# Altium PCB FEDD_TIMER_DP_7.PcbDoc
Units mm, origin at the board's own origin, x right, y up, seen from the top; angles counter-clockwise.
Board outline 95 x 87 mm, 2 copper layers (Top Layer, Bottom Layer); 56 components, 51 nets, 211 pads, 20 vias.
Unrouted connection lines stored in the file: 1.
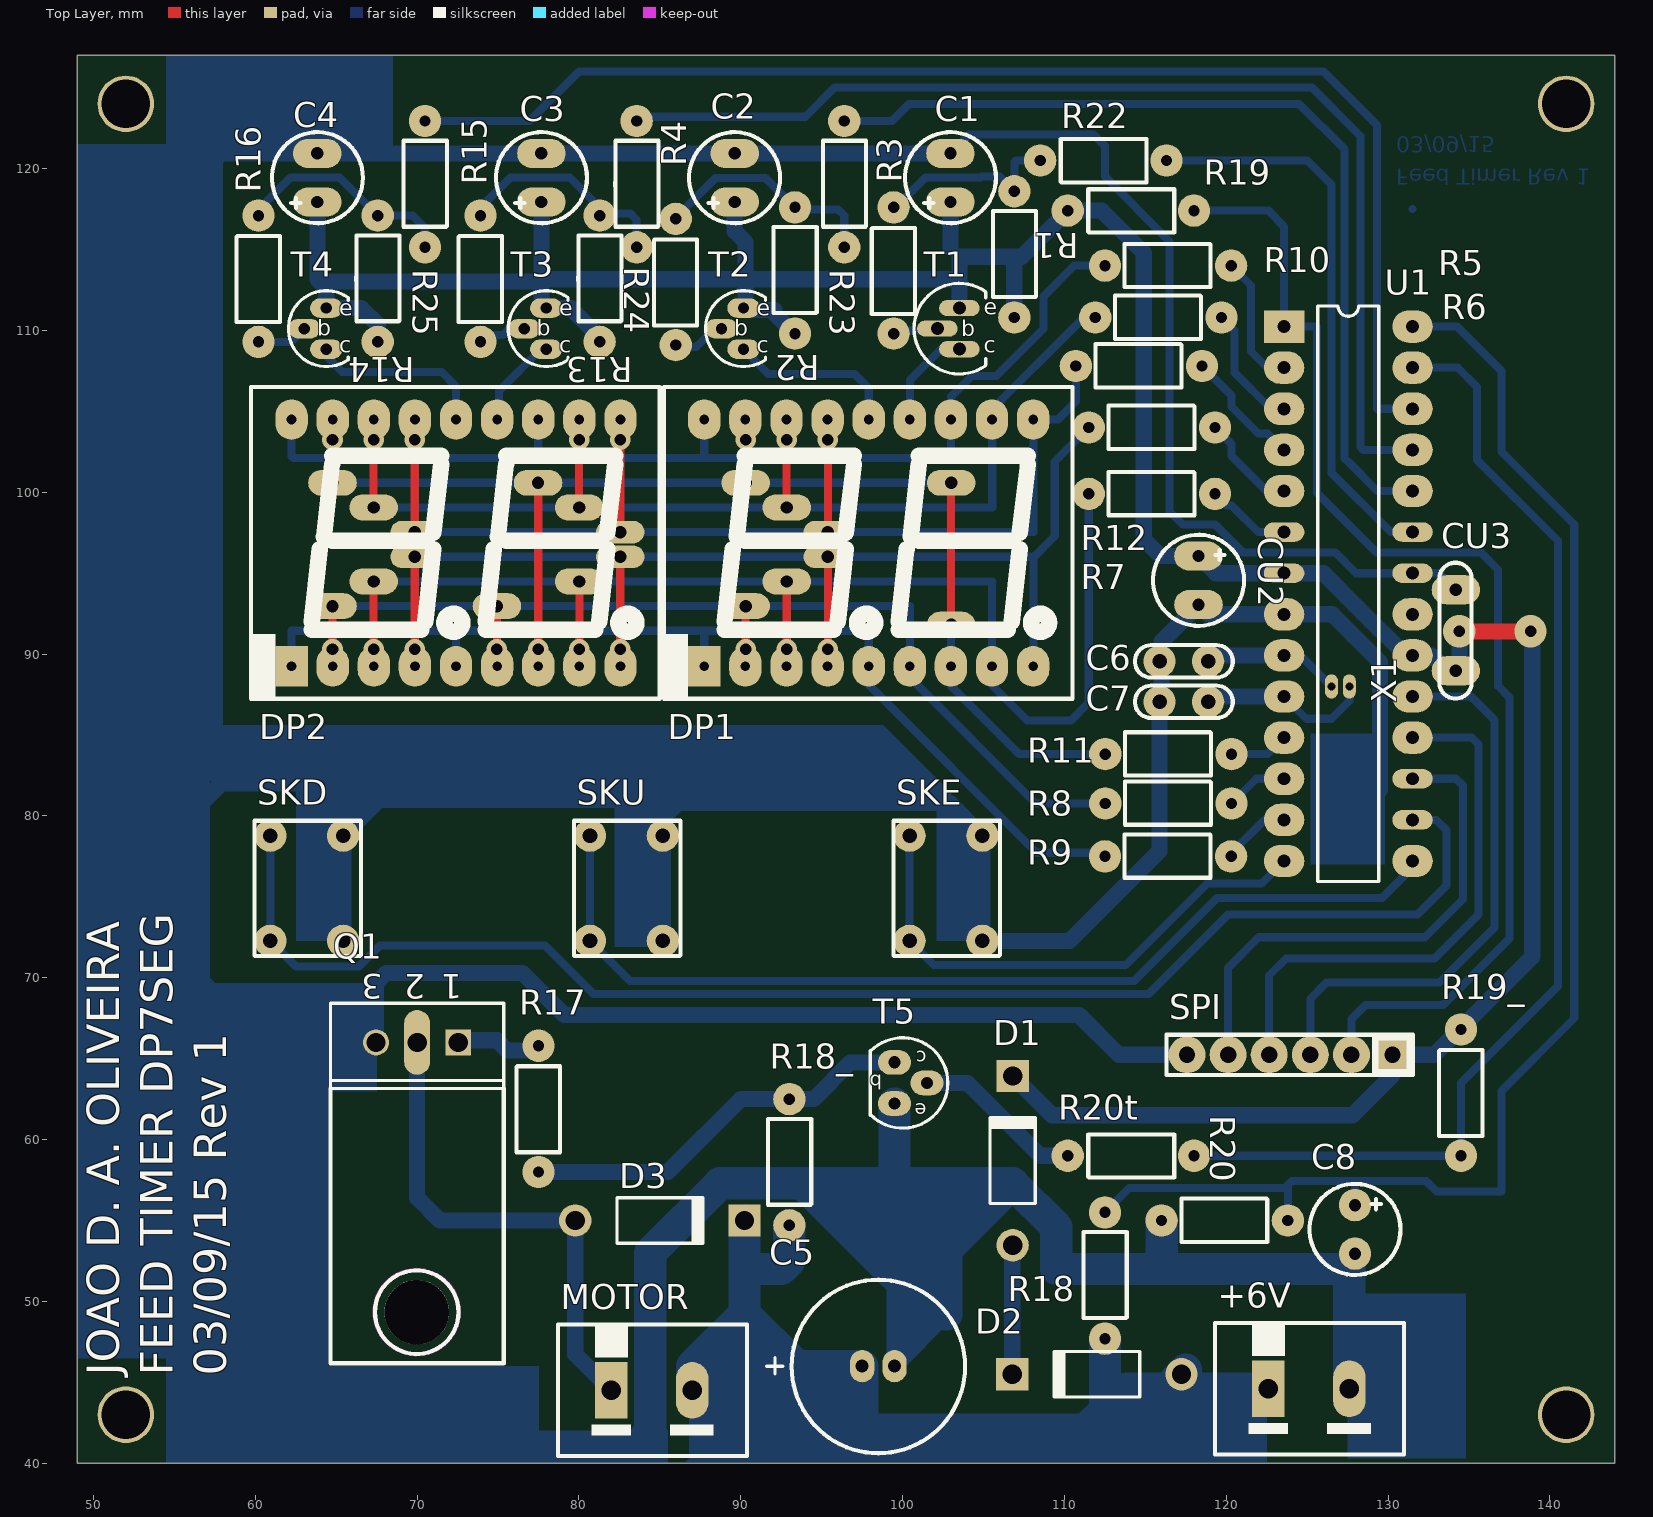
[diagram p0: Top Layer view]
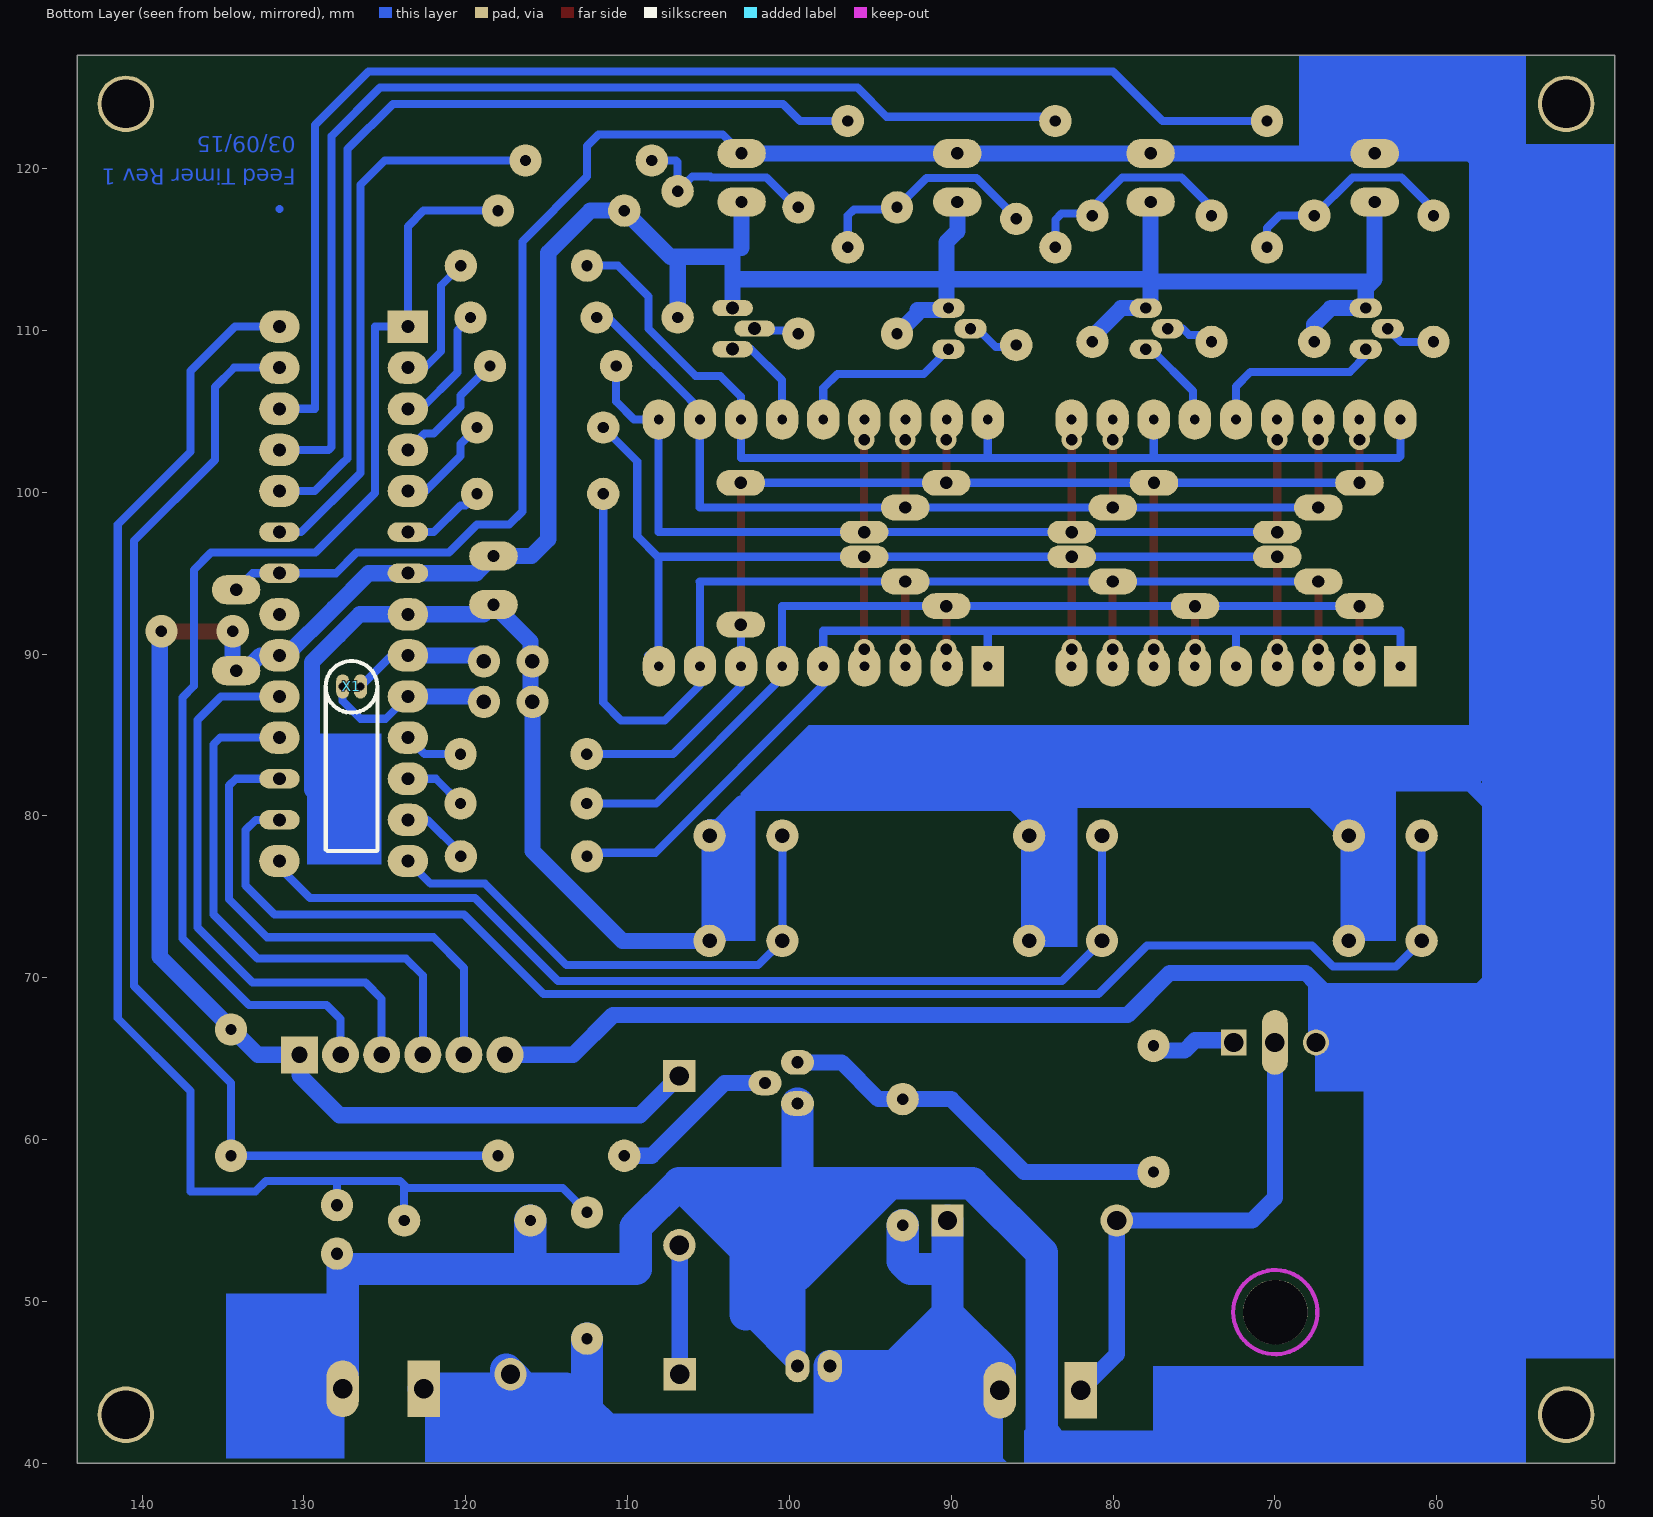
[diagram p1: Bottom Layer view, seen from below]
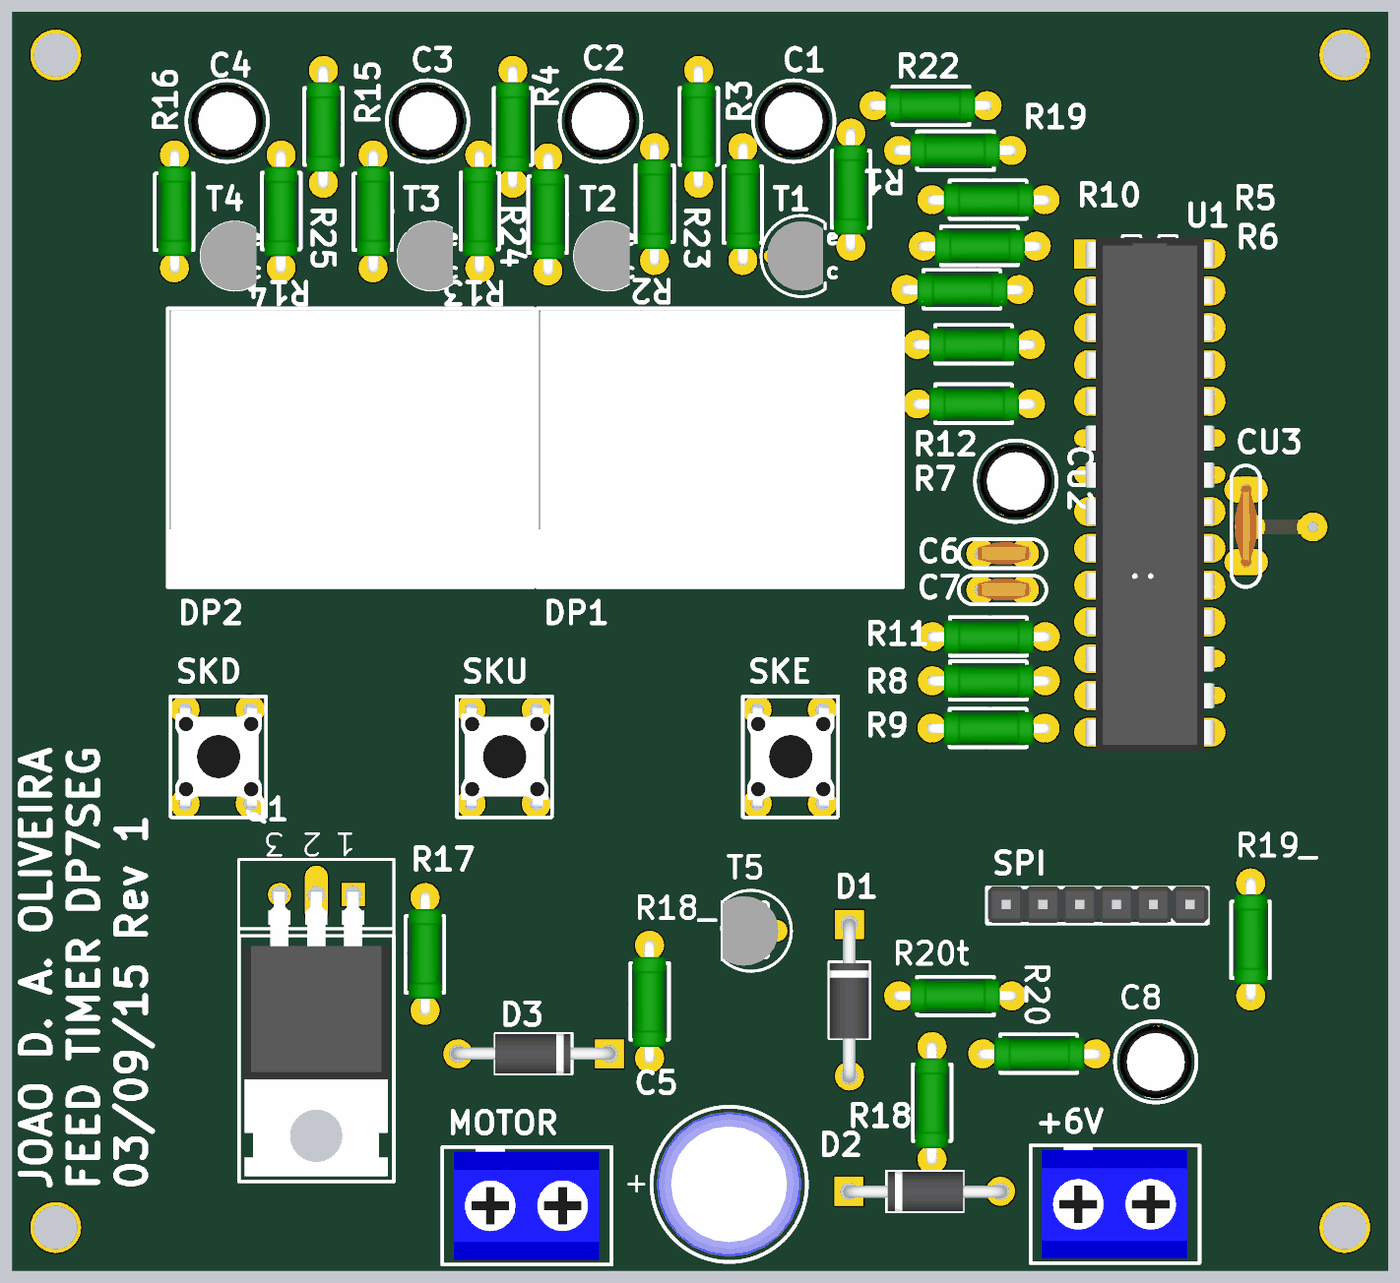
[diagram p2: 3D render of the assembled board from above, using the file's embedded part models]

## Layer stack, top to bottom
Top Solder: solder mask 0.0102, Solder Resist, Dk 3.5
Top Layer: signal copper 0.0356
Dielectric1: dielectric 0.32, FR-4, Dk 4.8
Bottom Layer: signal copper 0.0356
Bottom Solder: solder mask 0.0102, Solder Resist, Dk 3.5

## Board outline
144,127 49,127 49,40 144,40

## Design rules (kind name [scope] priority, off if disabled: settings)
Clearance [All] p1: gap=0.254
PolygonConnect [All] p1: connectstyle=Relief reliefconductorwidth=0.254 reliefentries=4 polygonreliefangle="90 Angle" airgapwidth=0.254
RoomDefinition FEED_TIMER_DP_7 [InComponentClass('FEED_TIMER_DP_7')] p1: confinementstyle=ConfineIn formatcopy=TRUE lockcomponents=FALSE outline 145,71 151,71 151,127 145,127
RoutingVias [All] p1: holewidth=0.711 width=1.27 viastyle="Through Hole" minholewidth=0.711 minwidth=1.27 maxholewidth=0.711 maxwidth=1.27
SilkToSolderMaskClearance SilkscreenOverComponentPads [IsPad] p1: minsilkscreentomaskgap=0.254 clearancetoexposedcopper=TRUE
SolderMaskExpansion [All] p1: expansion=0.102
UnpouredPolygon [All] p1: allowunpoured=FALSE
Width [All] p1: maxlimit=2 minlimit=0.5 preferedwidth=1
28 further rules are at their usual default settings.

## Components (designator, comment, footprint, x,y, rotation, side; value= is the part's Value field where it differs from the comment)
+6V "Male Connector 2 pins" BR102A 122.6,44.6 r90 top
C1 "Cap. Elet." "CAP ELE RAD 11mm H"#1 104.902,119.888 r90 top
C2 "Cap. Elet." "CAP ELE RAD 11mm H"#1 91.567,119.888 r90 top
C3 "Cap. Elet." "CAP ELE RAD 11mm H"#1 79.629,119.888 r90 top
C4 "Cap. Elet." "CAP ELE RAD 11mm H"#1 65.786,119.888 r90 top
C5 "Cap. Elet." CAP_RADIAL_2_10_16 97.5,46 r0 top
C6 "Disco" "CAP CER DISK 3MM" 119,89.5 r180 top
C7 "Disco" "CAP CER DISK 3MM" 119,87 r180 top
C8 "Cap. Elet." "CAP ELE RAD 11mm H"#2 126,54 r270 top
CU2 "Cap. Elet." "CAP ELE RAD 11mm H"#1 116.332,94.107 r270 top
CU3 "Disco" "CAP CER DISK 5MM" 134.112,88.646 r90 top
D1 "Diode 1N4001" DO-41 106.8,58.7 r90 top
D2 "Diode 1N4001" DO-41 112,45.5 r180 top
D3 "Diode 1N4001" DO-41 85,55 r0 top
DP1 "TOP5661BH" "DISPLAY TOP_5261BH" 87.743,89.242 r90 top locked
DP2 "TOP5661BH" "DISPLAY TOP_5261BH" 62.243,89.242 r90 top locked
MOTOR "Male Connector 2 pins" BR102A 82,44.5 r90 top
Q1 "IRF3205" "KC03 - Deitado" 70,66 r180 top
R1 "Resistor Generic" "RES 300 CR25" 106.9,118.6 r270 top
R2 "Resistor Generic" "RES 300 CR25" 93.345,117.602 r270 top
R3 "Resistor Generic" "RES 300 CR25" 99.441,109.802 r90 top
R4 "Resistor Generic" "RES 300 CR25" 85.979,109.093 r90 top
R5 "Resistor Generic" "RES 300 CR25" 111.9,110.8 r0 top
R6 "Resistor Generic" "RES 300 CR25" 110.7,107.8 r0 top
R7 "Resistor Generic" "RES 300 CR25" 111.5,99.9 r0 top
R8 "Resistor Generic" "RES 300 CR25" 112.522,80.772 r0 top
R9 "Resistor Generic" "RES 300 CR25" 112.5,77.5 r0 top
R10 "Resistor Generic" "RES 300 CR25" 112.5,114 r0 top
R11 "Resistor Generic" "RES 300 CR25" 112.522,83.82 r0 top
R12 "Resistor Generic" "RES 300 CR25" 111.5,104 r0 top
R13 "Resistor Generic" "RES 300 CR25" 81.28,117.094 r270 top
R14 "Resistor Generic" "RES 300 CR25" 67.564,117.094 r270 top
R15 "Resistor Generic" "RES 300 CR25" 73.914,109.294 r90 top
R16 "Resistor Generic" "RES 300 CR25" 60.198,109.294 r90 top
R17 "Resistor Generic" "RES 300 CR25" 77.5,58 r90 top
R18 "Resistor Generic" "RES 300 CR25" 112.5,55.5 r270 top
R18_ "Resistor Generic" "RES 300 CR25" 93,62.5 r270 top
R19 "Resistor Generic" "RES 300 CR25" 118,117.4 r180 top
R19_ "Resistor Generic" "RES 300 CR25" 134.5,59 r90 top
R20 "Resistor Generic" "RES 300 CR25" 116,55 r0 top
R20t "Resistor Generic" "RES 300 CR25" 118,59 r180 top
R22 "Resistor Generic" "RES 300 CR25" 116.3,120.5 r180 top
R23 "Resistor Generic" "RES 300 CR25" 96.393,122.936 r270 top
R24 "Resistor Generic" "RES 300 CR25" 83.566,122.936 r270 top
R25 "Resistor Generic" "RES 300 CR25" 70.485,122.936 r270 top
SKD "SW-PBST 4 Pins" "SW-PBST 4 Pins - SKHH 17 mm" 62.5,76 r0 top
SKE "SW-PBST 4 Pins" "SW-PBST 4 Pins - SKHH 17 mm" 102,76 r0 top
SKU "SW-PBST 4 Pins" "SW-PBST 4 Pins - SKHH 17 mm" 82.25,76 r0 top
SPI "BAR 6 PINS" "HEADER BAR 6 PINS" 129,64 r180 top
T1 "BC516" "TO-92 - Large" 103.505,110.109 r0 top
T2 "BC516" TO-92 90.17,110.109 r0 top
T3 "BC516" TO-92 77.978,110.109 r0 top
T4 "BC516" TO-92 64.389,110.109 r0 top
T5 "Transistor" "TO-92 - BIG" 99.5,63.5 r180 top
U1 "ATmega328-PA-PU" 28P3 123.571,110.236 r0 top
X1 "XTAL" "XTAL CILINDRIC DEITADO" 122.5,88 r180 bottom

## Footprints (in the part's own frame and the unit in brackets; to place one, negate y for a bottom-side part, rotate by r counter-clockwise, add the part's x,y. Pads: shape width x height; smd on the part's side, far side on the other; paste and mask are expansions set on the pad)
28P3 [mm] "Atmel DIP 28"
  rect 2.5x2 hole 0.8: 1(0,0)
  oval 2.5x2 hole 0.8: 2(0,-2.54) 3(0,-5.08) 4(0,-7.62) 5(0,-10.16) 8(0,-17.78) 9(0,-20.32) 10(0,-22.86) 11(0,-25.4) 12(0,-27.94) 13(0,-30.48) 14(0,-33.02) 15(7.938,-33.02) 18(7.938,-25.4) 19(7.938,-22.86) 20(7.937,-20.32) 21(7.938,-17.78) 24(7.938,-10.16) 25(7.938,-7.62) 26(7.938,-5.08) 27(7.938,-2.54) 28(7.938,0)
  oval 2.5x1.2 hole 0.8: 6(0,-12.7) 7(0,-15.24) 16(7.938,-30.48) 17(7.937,-27.94) 22(7.937,-15.24) 23(7.937,-12.7)
  silkscreen extent 2.09,-34.29 5.85,1.27, body extent -0.48,-34.4 8.43,1.1, height 3.2
BR102A [mm] "MetalTex Borne 2 vias passo 5mm"
  rect 3.5x2 hole 1.2: 1(0,0)
  oval 3.5x2 hole 1.2: 2(0,-5)
  silkscreen extent -4.06,-8.37 4.06,3.3, body extent -3.75,-7.5 3.75,2.5, height 10.01
"CAP CER DISK 3MM" [mm] "CAP CER DISK 3MM"
  round 2 hole 0.9: 1(0.125,-0.05) 2(3.125,-0.05)
  silkscreen extent -1.4,-1.05 4.65,0.95, body extent -0.29,-0.82 3.39,0.67, height 5
"CAP CER DISK 5MM" [mm] "CAP CER DISK 5MM"
  oval 1.8x3 hole 0.762: 1(0.325,-0.075) 2(5.325,-0.075)
  silkscreen extent -1.4,-1.05 7,0.95, body extent -0.01,-0.82 5.67,0.67, height 6.24
"CAP ELE RAD 11mm H"#1 [mm] "Cap Eletrolitic Radial 11mm Height"
  oval 1.8x3 hole 0.762: 1(-1.95,1.95) 2(1.05,1.95)
  silkscreen extent -3.26,-0.86 2.36,4.76, body extent -2.95,-0.55 2.05,4.45, height 4.52
"CAP ELE RAD 11mm H"#2 [mm] "Cap Eletrolitic Radial 11mm Height"
  round 2 hole 0.762: 1(-1.95,1.95) 2(1.05,1.95)
  silkscreen extent -3.26,-0.86 2.36,4.76, body extent -2.94,-0.55 2.1,4.45, height 11.03
CAP_RADIAL_2_10_16 [mm] "Cap Radial 2mm x 10mm x 16mm height"
  oval 1.5x2 hole 0.8: 1(0,0) 2(2,0)
  silkscreen extent -5.92,-5.38 6.36,5.34, body extent -4.01,-5.01 5.99,4.99, height 16.03
"DISPLAY TOP_5261BH" [mm] "7 Segment LED Display 2 digits"
  rect 2.5x2 hole 0.6: 1(0,0)
  oval 2.5x2 hole 0.6: 2(0,-2.54) 3(0,-5.08) 4(0,-7.62) 5(0,-10.16) 6(0,-12.7) 7(0,-15.24) 8(0,-17.78) 9(0,-20.32) 10(15.25,-20.32) 11(15.25,-17.78) 12(15.25,-15.24) 13(15.25,-12.7) 14(15.25,-10.16) 15(15.25,-7.62) 16(15.25,-5.08) 17(15.25,-2.54) 18(15.25,0)
  silkscreen extent -2,-22.75 17.25,2.5, body extent -1.9,-22.7 17.1,2.3, height 6.82
DO-41 [mm] "Diode, Axial; Body 5.2 x 2.7 mm (LxDia. max), Lead Dia. 0.86 mm (max)"
  round 2 hole 1.2: 1(-5.23,0)
  rect 2x2 hole 1.2: 2(5.23,0)
  silkscreen extent -2.65,-1.4 2.75,1.4, body extent -5.7,-1.36 5.62,1.4, height 2.74
"HEADER BAR 6 PINS" [mil] ".100 Inch AMPMODU Header 6 Pins"
  rect 90x90 hole 40: 1(-50,-48.82)
  round 90 hole 40: 2(50,-48.82) 3(150,-48.82) 4(250,-48.82) 5(350,-48.82) 6(450,-48.82)
  silkscreen extent -100,-98 500,0, body extent -102,-101 498,-2, height 328
"KC03 - Deitado" [mm] "TO, Thru-Hole, Vertical, Heatsink Mounted; 3 In-Line Leads; Pitch 2.54 mm"
  rect 1.6x1.6 hole 1.2: 1(-2.54,0)
  oval 1.6x4 hole 1.2: 2(0,0)
  round 1.6 hole 1.2: 3(2.54,0)
  round 4 hole 4: ""(0.025,16.662)
  Keep-Out Layer circle w0.254: c0.025,16.662 r2.6
  silkscreen extent -5.35,-2.42 5.35,19.83, body extent -4.99,-0.25 5.01,19.47, height 4.5
"RES 300 CR25" [mm] "Resistor CR25 300Mil height 2.4"
  round 2 hole 0.7: 1(0,0) 2(7.8,0)
  silkscreen extent 1.22,-1.35 6.53,1.35, body extent -0.34,-1.17 8.16,1.13, height 2.29
"SW-PBST 4 Pins - SKHH 17 mm" [mm] "Tactile switch SKHH 17mm"
  round 2 hole 0.9: 1(2.93,2.78) 2(2.93,-3.72) 3(-1.57,2.78) 4(-1.57,-3.72)
  silkscreen extent -2.56,-4.66 4.02,3.7, body extent -2.25,-4.45 3.75,3.51, height 13
TO-92 [mm] "TO, Flat Index; 3 In-Line, Axial Leads; Body Dia. 4.6mm; Leads 0.41 x 0.39 mm (max)"
  oval 2x1.2 hole 0.7: 1(0,1.27) 2(-1.36,0) 3(0,-1.27)
  silkscreen extent -2.34,-2.34 1.35,2.34, body extent -2.41,-2.39 1.46,2.41, height 2.76
"TO-92 - BIG" [mil] "TO, Flat Index; 3 In-Line, Axial Leads; Body Dia. 4.6mm; Leads 0.41 x 0.39 mm (max)"
  oval 80x60 hole 30: 1(0,50) 2(-78.74,0) 3(0,-50)
  silkscreen extent -130,-110 59,110, body extent -95,-94 57,95, height 109
"TO-92 - Large" [mm] "TO, Flat Index; 3 In-Line, Axial Leads; Body Dia. 4.6mm; Leads 0.41 x 0.39 mm (max)"
  oval 2.5x1 hole 0.8: 1(0,1.27) 2(-1.36,0) 3(0,-1.27)
  silkscreen extent -2.8,-2.8 1.63,2.8, body extent -2.41,-2.39 1.46,2.41, height 2.76
"XTAL CILINDRIC DEITADO" [mm] "CILINDRIC 3mm dia"
  oval 0.8x1.5 hole 0.5: 1(-5.1,0) 2(-4,0)
  silkscreen extent -6.16,-10.18 -2.96,1.57, body extent -6.05,-10 -3.05,0.2, height 2.95

## Part data
+6V MOTOR: library part "Male Con 2 Pin"
C1 C2 C3 C4 C5 C8 CU2: library part CAP_RADIAL_ELETROLITICO, "Capacitor Radial Eletrolitico"
C6 C7 CU3: library part CAP_DISCO, "SMD Capacitor 1210 size"
D1 D2 D3: "1 Amp General Purpose Rectifier"
DP1 DP2: library part "DISPLAY TOP_5261BH", "7 seg display"
Q1: library part "T-HEXFET N", "HEXFET Power MOSFET"
R1 R2 R3 R4 R5 R6 R7 R8 R9 R10 R11 R12 R13 R14 R15 R16 R17 R18 R18_ R19 R19_ R20 R20t R22 R23 R24 R25: "Generic Resistor"
SKD SKE SKU: library part "SW-PBST 4 Pins SKHH"
SPI: library part "HEADER BAR  6 PINS", ".100 Inch AMPMODU Headers 1-826629-0 (Tyco)"
T1 T2 T3 T4: library part T-PNP, "General Bipolar Transistor NPN"
T5: library part T-NPN, "General Bipolar Transistor NPN"
U1: "8-Bit AVR Microcontroller with 8K Bytes of In-System Programmable Flash Memory"
X1: "Crystal Oscillator"

## Free pads (board coordinates)
  oval 3x1.6 hole 0.762: 1(64.77,92.964) 1(64.77,100.584) 1(67.31,94.488) 1(67.31,99.06) 1(74.93,92.964) 1(77.47,100.584) 1(80.01,94.488) 1(80.01,99.06) 1(90.297,92.964) 1(90.297,100.584) 1(92.837,94.488) 1(92.837,99.06) 1(102.997,91.821) 1(102.997,100.584)
  oval 3x1.4 hole 0.762: 1(69.85,96.012) 1(69.85,97.536) 1(82.55,96.012) 1(82.55,97.536) 1(95.377,96.012) 1(95.377,97.536)
  round 3.5 hole 3: ""(52,43) ""(52,124) ""(141,43) ""(141,124)

## Via types
v1: diameter 1.27, hole 0.711, Top Layer to Bottom Layer, 18 vias
v2: diameter 2, hole 0.711, Top Layer to Bottom Layer, 2 vias

## Nets (pads, with @x,y where several pads share a name; then routed paths per layer and width w, separated by ;. In a path a pad name is that pad's centre, name@x,y a point inside that pad or via, vN(x,y) a via of type N, cw(c..) or ccw(c..) an arc to the next point about the centre after c; other vN are vias at no path point)
6V: +6V.1 C5.1 D2.1 D3.2 MOTOR.2 R18.2 R18_.2 | length 62
  Bottom Layer w2: MOTOR.2 87,46 90.23,49.23 ; D3.2 90.23,52 ; R18_.2 93,52.5 92.5,52 90.23,52 ; R18.2 112.5,43.5 112.615,43.385 ; 116,44.27 116.33,44.6 ; D2.1@117.5,45.77 D2.1 116.33,44.6 ; +6V.1 116.33,44.6 ; 90.23,49.23 93.46,46 97.496,46 97.496,42.304 97.73,42.07 111.3,42.07 112.615,43.385 ; 90.23,49.23 90.23,52 ; 112.615,43.385 113.5,44.27 113.83,44.6 116.33,44.6
DPDRV1: DP1.13 T1.3 | length 6.3
  Bottom Layer w0.5: DP1.13 100.457,104.506 100.457,106.934 102.362,108.839 T1.3
DPDRV2: DP1.14 T2.3 | length 10.7
  Bottom Layer w0.5: T2.3 91.694,107.315 97.028,107.315 97.903,106.44 DP1.14
DPDRV3: DP2.13 T3.3 | length 5.8
  Bottom Layer w0.5: DP2.13 75.057,104.606 75.057,106.257 77.639,108.839 T3.3
DPDRV4: DP2.14 T4.3 | length 11.3
  Bottom Layer w0.5: T4.3 64.389,108.411 65.358,107.442 71.501,107.442 72.403,106.54 DP2.14
DRV1: R22.1 U1.23 | length 35.1
  Bottom Layer w0.5: R22.1 125,120.5 126.5,119 126.5,101.2 130.164,97.536 U1.23
DRV2: R23.1 U1.24 | length 56.7
  Bottom Layer w0.5: R23.1 99.336,122.936 100.4,124 124.5,124 127.3,121.2 127.3,102.095 127.507,101.888 127.512,101.888 129.324,100.076 U1.24
DRV3: R24.1 U1.25 | length 69.3
  Bottom Layer w0.5: R24.1 83.83,123.2 93.99,123.2 95.79,125 125.3,125 128.3,122 128.3,102.8 128.484,102.616 U1.25
DRV4: R25.1 U1.26 | length 81.2
  Bottom Layer w0.5: R25.1 76.936,122.936 80,126 126,126 129.3,122.7 129.3,105.156 U1.26
GND: +6V.2 C1.2 C2.2 C3.2 C4.2 C5.2 C6.2 C7.2 C8.2 CU2.2 CU3.2 Q1.3 R20.1 SKD.1 SKD.2 SKE.1 SKE.2 SKU.1 SKU.2 SPI.6 T5.1 U1.8 U1.22 | length 490.4
  Bottom Layer w0.5: C1.2 104.114,122.1 111.8,122.1 112.5,121.4 112.5,119.5 116.5,115.5 116.5,98.806 117.306,98 119.3,98 121.034,96.266 126.746,96.266 128.016,94.996 U1.22 133.162,94.996 CU3.2
  Bottom Layer w1: SKD.2 SKD.1 ; Q1.3 67.46,69.66 ; 67.625,69.825 67.46,69.66 ; 84.025,41.525 58.525,41.525 58,41 58,66.4 57.6,66.8 ; SKU.2 SKU.1 ; 99.5,51.6 C5.2 102.7,49.2 ; C1.2 C2.2 C3.2 C4.2 57.938,120.938 56.7,119.7 56.7,80.8 ; SPI.6 113.36,65.24 110.9,67.7 79.1,67.7 76.5,70.3 68.1,70.3 67.46,69.66 ; 129.5,81.621 129.5,89.5 127.849,91.151 126.544,92.456 U1.8 118.883,92.456 CU2.2 116,90.775 116,87.175 C7.2 115.875,77.84 110.315,72.28 SKE.2 SKE.1 102.91,80.8 86.1,80.8 85.2,79.9 85.2,78.8 SKU.1 ; 56.7,80.8 57.9,82 64.5,82 65.43,81.07 SKD.1 ; 56.7,80.8 56.7,67.7 57.6,66.8 ; 57.6,66.8 58.1,66.3 58.15,66.35 62.3,66.35 64.75,68.8 66.6,68.8 67.46,69.66 ; SKD.1 67.65,81 83.8,81 85.18,79.62 SKU.1
  Bottom Layer w2: 84.025,41.525 84.4,41.9 84.4,53 88.7,57.3 93.8,57.3 99.5,51.6 ; 99.5,57.5 T5.1 ; 102.7,49.2 102.7,53.2 106.8,57.3 109.5,54.6 109.5,52 116,52 ; R20.1 116,52 ; +6V.2 127.6,52 121,52 116,52
KD: SKD.3 SKD.4 U1.16 | length 90.2
  Bottom Layer w0.5: SKD.3 SKD.4 62.51,70.7 66.4,70.7 67.7,72 77.9,72 80.9,69 115.2,69 120.1,73.9 131.812,73.9 133.604,75.692 133.604,79.121 132.969,79.756 U1.16
KE: SKE.3 SKE.4 U1.14 | length 32.9
  Bottom Layer w0.5: SKE.3 SKE.4 101.934,70.776 113.776,70.776 118.811,75.811 122.166,75.811 U1.14
KU: SKU.3 SKU.4 U1.15 | length 61.7
  Bottom Layer w0.5: SKU.3 SKU.4 83.16,69.8 114.3,69.8 119.43,74.93 129.63,74.93 131.509,76.809 U1.15
MISO: SPI.4 U1.18 | length 34.2
  Bottom Layer w0.5: SPI.4 122.65,70.15 123.7,71.2 132.875,71.2 135.575,73.9 135.575,84.425 135.164,84.836 U1.18
MOSI: SPI.5 U1.17 | length 32
  Bottom Layer w0.5: SPI.5 120.11,70.61 122,72.5 132.275,72.5 134.625,74.85 134.625,81.875 134.204,82.296 U1.17
MOTOR: R19_.1 R20t.1 U1.27 | length 73
  Bottom Layer w0.5: R20t.1 R19_.1 134.5,63.5 140.5,69.5 140.5,97 135.5,102 135.5,106.5 134.304,107.696 U1.27
NetC8_1: C8.1 R18.1 R20.2 U1.28 | length 90.3
  Bottom Layer w0.5: R18.1 114,57 123.6,57 123.8,57.2 ; R20.2 123.8,57.2 ; C8.1 127.95,57.45 ; 131.5,117.5 131.508,117.492 ; U1.28 134.264,110.236 137,107.5 137,102.5 141.5,98 141.5,67.5 137,63 137,56.8 133,56.8 132.35,57.45 127.95,57.45 ; 123.8,57.2 124.05,57.45 127.95,57.45
NetD1_1: D1.1 D2.2 | length 8
  Bottom Layer w1: D2.2 106.77,53.44 D1.1
NetD3_1: D3.1 MOTOR.1 Q1.2 | length 31.7
  Bottom Layer w1: Q1.2@70,66.35 70,56.4 71.4,55 D3.1 79.77,46.73 MOTOR.1
NetQ1_1: Q1.1 R17.2 | length 4.9
  Bottom Layer w1: Q1.1@72.615,66.1 72.575,66.14 74.935,66.14 75.575,65.5 R17.2@77.2,65.5
NetR1_1: R1.1 R3.2 R22.2 | length 12.1
  Bottom Layer w0.5: R3.2 99.568,117.602 101.416,119.45 104.832,119.45 104.882,119.5 106,119.5 R1.1 106.9,120.4 107,120.5 R22.2
NetR2_1: R2.1 R4.2 R23.2 | length 14.4
  Bottom Layer w0.5: R4.2 86.614,117.528 86.614,117.602 88.437,119.425 91.522,119.425 R2.1 93.472,117.475 96.012,117.475 96.393,117.094 R23.2
NetR3_1: R3.1 T1.2 | length 2.8
  Bottom Layer w0.5: R3.1 99.639,110 101.745,110 101.854,110.109 T1.2
NetR4_1: R4.1 T2.2 | length 3.2
  Bottom Layer w0.5: R4.1@86.106,108.966 87.249,108.966 88.392,110.109 T2.2
NetR13_1: R13.1 R15.2 R24.2 | length 13.9
  Bottom Layer w0.5: R15.2 73.914,117.602 75.762,119.45 79.432,119.45 81.28,117.602 R13.1@81.534,117.602 ; R13.1 81.407,117.221 83.185,117.221 83.566,116.84 R24.2
NetR14_1: R14.1 R16.2 R25.2 | length 14
  Bottom Layer w0.5: R16.2 60.198,117.475 62.173,119.45 65.208,119.45 R14.1 69.723,117.094 70.485,116.332 R25.2
NetR15_1: R15.1 T3.2 | length 2.9
  Bottom Layer w0.5: R15.1@73.914,109.802 73.988,109.728 75.311,109.728 75.692,110.109 T3.2
NetR16_1: R16.1 T4.2 | length 3.2
  Bottom Layer w0.5: R16.1 62.214,109.294 T4.2
NetR17_1: R17.1 R18_.1 T5.3 | length 24.8
  Bottom Layer w1: R17.1 85.5,58 90,62.5 R18_.1 94.5,62.5 96.77,64.77 T5.3
NetR20t_2: R20t.2 T5.2 | length 10.6
  Bottom Layer w1: T5.2 104,63.5 108.5,59 R20t.2
RES-A: R5.2 U1.3 | length 7.7
  Bottom Layer w0.5: R5.2 120.5,110 120.5,107.4 122.744,105.156 U1.3
RES-B: R6.2 U1.4 | length 7.6
  Bottom Layer w0.5: R6.2 120.322,105.978 120.322,105.283 121.973,103.632 122.555,103.632 U1.4
RES-C: R7.2 U1.6 | length 5.3
  Bottom Layer w0.5: R7.2 120.013,99.187 120.322,99.187 121.973,97.536 U1.6
RES-D: R8.2 U1.12 | length 3.9
  Bottom Layer w0.5: R8.2 121.846,82.296 U1.12
RES-E: R9.2 U1.13 | length 4.1
  Bottom Layer w0.5: R9.2@120.322,77.724 122.354,79.756 U1.13
RES-F: R10.2 U1.2 | length 8.3
  Bottom Layer w0.5: R10.2 121.513,112.787 121.513,108.713 122.531,107.696 U1.2
RES-G: R11.2 U1.11 | length 3.7
  Bottom Layer w0.5: R11.2 122.555,83.82 U1.11
RES-P: R12.2 U1.5 | length 6.3
  Bottom Layer w0.5: R12.2 120.322,102.978 120.322,102.235 122.481,100.076 U1.5
RESET: R19.1 SPI.2 U1.1 | length 74.8
  Bottom Layer w0.5: R19.1 122.6,117.4 123.571,116.429 U1.1 125.6,110.236 125.6,99.952 129.286,96.266 135.734,96.266 136.8,95.2 136.8,88.02 137.5,87.32 137.5,72.434 133.391,68.325 128.6,68.325 127.73,67.455 SPI.2
SCK: SPI.3 U1.19 | length 35.2
  Bottom Layer w0.5: SPI.3 125.19,68.69 126.2,69.7 133.175,69.7 136.575,73.1 136.575,85.925 135.124,87.376 U1.19
SEG-A: DP1.11 DP1.16 DP2.11 DP2.16 pad.1@67.31,99.06 pad.1@80.01,99.06 pad.1@92.837,99.06 R5.1 | length 69.8
  Top Layer w0.5: pad.1@67.31,99.06 v1(67.31,103.251) 67.31,104.479 DP2.16 ; pad.1@80.01,99.06 v1(80.01,103.251) 80.01,104.479 DP2.11 ; DP1.16 92.823,99.074 pad.1@92.837,99.06 ; DP1.11 DP1.11@105.537,104.478
  Bottom Layer w0.5: pad.1@67.31,99.06 80.01,99.06 92.837,99.06 105.537,99.06 DP1.11@105.537,104.478 ; DP1.11 105.523,105.123 106.826,106.426 109.5,109.1 111.2,110.8 R5.1@112.4,110.8
  other v1: 92.837,103.251
SEG-B: DP1.10 DP1.15 DP2.10 DP2.15 pad.1@69.85,97.536 pad.1@82.55,97.536 pad.1@95.377,97.536 R6.1 | length 71.4
  Top Layer w0.5: pad.1@69.85,97.536 v1(69.85,103.251) 69.85,104.479 DP2.15 ; pad.1@82.55,97.536 v1(82.55,103.251) 82.55,104.479 DP2.10 ; DP1.15 95.377,104.478 v1(95.377,103.251) pad.1@95.377,97.536 ; DP1.10 DP1.10@108.077,104.478
  Bottom Layer w0.5: pad.1@69.85,97.536 82.55,97.536 95.377,97.536 108.077,97.536 108.077,99.314 DP1.10@108.077,104.478 ; DP1.10 109.592,104.492 110.7,105.6 R6.1
SEG-C: DP1.3 DP1.8 DP2.3 DP2.8 pad.1@67.31,94.488 pad.1@80.01,94.488 pad.1@92.837,94.488 R7.1 | length 80.6
  Top Layer w0.5: pad.1@67.31,94.488 v1(67.31,90.297) 67.31,89.255 DP2.3 ; pad.1@80.01,94.488 80.023,94.475 DP2.8 ; DP1.3 92.837,89.256 v1(92.837,90.297) pad.1@92.837,94.488
  Bottom Layer w0.5: pad.1@67.31,94.488 80.01,94.488 92.837,94.488 105.537,94.488 ; 105.523,94.474 DP1.8 105.523,88.077 107.7,85.9 110.4,85.9 111.5,87 R7.1
  other v1: 80.01,90.297
SEG-D: DP1.2 DP1.6 DP2.2 DP2.6 pad.1@64.77,92.964 pad.1@74.93,92.964 pad.1@90.297,92.964 R8.1 | length 66.6
  Top Layer w0.5: pad.1@64.77,92.964 v1(64.77,90.297) 64.77,89.255 DP2.2 ; pad.1@74.93,92.964 v1(74.93,90.297) 74.93,89.255 DP2.6 ; DP1.2 90.297,89.256 v1(90.297,90.297) pad.1@90.297,92.964
  Bottom Layer w0.5: pad.1@64.77,92.964 74.93,92.964 90.297,92.964 100.457,92.964 ; 100.443,92.95 DP1.6 100.457,89.228 100.457,88.543 108.228,80.772 R8.1
SEG-E: DP1.1 DP1.5 DP2.1 DP2.5 R9.1 | length 64.7
  Bottom Layer w0.5: DP2.1 62.243,91.427 62.23,91.44 72.263,91.44 ; DP2.5 72.403,91.3 72.263,91.44 ; DP1.1 87.743,91.426 87.757,91.44 ; R9.1@112.522,77.724 108.276,77.724 97.79,88.21 97.79,89.129 DP1.5 97.903,91.426 97.917,91.44 87.757,91.44 ; 72.263,91.44 87.757,91.44
SEG-F: DP1.12 DP1.18 DP2.12 DP2.18 R10.1 | length 65.7
  Bottom Layer w0.5: DP2.18 62.243,102.222 62.357,102.108 77.47,102.108 ; DP2.12 77.483,102.121 77.47,102.108 ; DP1.18 87.743,102.122 87.757,102.108 ; R10.1 110.6,114 108.7,112.1 108.7,110.1 105.788,107.188 104.267,107.188 102.983,105.904 DP1.12 102.983,102.122 102.997,102.108 87.757,102.108 ; 77.47,102.108 87.757,102.108
SEG-G: DP1.7 DP1.17 DP2.7 DP2.17 pad.1@64.77,100.584 pad.1@77.47,100.584 pad.1@90.297,100.584 pad.1@102.997,91.821 pad.1@102.997,100.584 R11.1 | length 81.3
  Top Layer w0.5: pad.1@64.77,100.584 v1(64.77,103.251) 64.77,104.479 DP2.17 ; pad.1@77.47,100.584 77.483,100.571 DP2.7 ; DP1.17 90.297,104.478 v1(90.297,103.251) pad.1@90.297,100.584 ; pad.1@102.983,91.821 102.983,92.075 102.997,92.089 pad.1@102.997,100.584
  Bottom Layer w0.5: pad.1@64.77,100.584 77.47,100.584 90.297,100.584 pad.1@102.997,100.584 ; pad.1@102.997,91.821 102.997,89.256 DP1.7 102.983,88.017 107.18,83.82 R11.1
  other v1: 77.47,90.297
SEG-P: DP1.4 DP1.9 DP2.4 DP2.9 pad.1@69.85,96.012 pad.1@82.55,96.012 pad.1@95.377,96.012 R12.1 | length 75.7
  Top Layer w0.5: pad.1@69.85,96.012 v1(69.85,90.297) 69.85,89.255 DP2.4 ; pad.1@82.55,96.012 v1(82.55,90.297) 82.55,89.255 DP2.9 ; DP1.4 95.377,89.256 v1(95.377,90.297) pad.1@95.377,96.012 ; DP1.9 DP1.9@108.077,89.256
  Bottom Layer w0.5: pad.1@69.85,96.012 82.55,96.012 95.377,96.012 108.077,96.012 108.077,95.977 109.4,97.3 109.4,101.9 R12.1 ; DP1.9 DP1.9@108.077,89.256 ; 108.077,96 DP1.9@108.077,89.256 ; DP1.9@108.737,89.916 DP1.9@108.077,89.256
VCC: C1.1 C2.1 C3.1 C4.1 CU2.1 CU3.1 D1.2 R1.2 R2.2 R13.2 R14.2 R19.2 R19_.2 SPI.1 T1.1 T2.1 T3.1 T4.1 U1.7 U1.20 | length 202.2
  Top Layer w1: v2(134.4,91.4) v2(138.8,91.4)
  Bottom Layer w0.5: 63.836,113.157 63.963,113.03 ; T3.1@77.679,111.678 T3.1 ; 77.679,113.03 77.806,113.157 ; T2.1@90.297,111.252 T2.1 T2.1@90.297,111.506 ; 92.075,111.072 92.075,111.252 ; 102.952,115.107 103.505,114.554
  Bottom Layer w1: 63.836,113.157 C4.1 ; R14.2 67.564,110.363 66.548,111.379 T4.1 64.389,112.604 63.963,113.03 77.679,113.03 ; T3.1@77.679,111.678 77.679,113.03 ; C3.1 77.679,113.03 ; 77.806,113.157 90.297,113.157 ; T3.1 79.502,111.379 R13.2@81.079,109.802 ; C2.1 89.617,116.123 90.297,115.443 90.297,113.157 ; T2.1@90.297,111.252 92.075,111.252 ; T2.1@90.297,111.506 90.297,113.157 ; 92.075,111.072 R2.2 ; 102.952,115.107 C1.1 ; T1.1 103.505,113.157 ; D1.2 109.23,61.5 127.8,61.5 130.27,63.97 SPI.1 132.84,65.24 138.9,71.3 138.9,91.3 v2(138.8,91.4) ; R1.2 106.9,114.554 ; v2(134.4,91.4) 134.4,89.184 CU3.1 133.629,88.971 132.684,89.916 U1.20 131.084,89.916 128.161,92.839 126.004,94.996 U1.7 119.343,94.996 CU2.1 115.943,96.057 114.9,97.1 114.9,114.8 112.3,117.4 R19.2 107.354,114.554 106.9,114.554 ; 90.297,113.157 103.505,113.157 ; 103.505,113.157 103.505,114.554 106.9,114.554 ; v2(138.8,91.4) 138.8,91.5 138.7,91.5 v2(138.8,91.4)
XTAL1: C6.1 U1.9 X1.2 | length 8.6
  Bottom Layer w0.5: U1.9 124.584,89.916 X1.2
  Bottom Layer w1: C6.1 119.241,89.916 U1.9
XTAL2: C7.1 U1.10 X1.1 | length 10.8
  Bottom Layer w0.5: U1.10 124.943,86.004 126.504,86.004 127.6,87.1 X1.1
  Bottom Layer w1: C7.1 119.201,87.376 U1.10
pads on no net: Q1. U1.21

## Other copper
Bottom Layer:
  rectangle net GND: 62.5,72.28 65.43,82.3
  rectangle net GND: 82.2,71.9 85,81.8
  rectangle net GND: 102.1,72.28 105.1,79.8
  rectangle net GND: 102.1,79.3 103.6,80.4
  rectangle net GND: 127.5,40.3 134.8,50.5
  rectangle net GND: 125.2,77 129.8,85.1
  region net GND: 57.9,85.6 98.8,85.6 103,81.4 103,80.71 86.19,80.71 86.1,80.8 85.6,80.3 84.5,80.3 83.8,81 67.5,81 65.7,79.2 65.3,79.2 65.3,80.94 65.43,81.07 64.5,82 57.8,82 57.6,81.8 57.2,82.2 57.2,84.8
  region net GND: 93.4,58.3 106.9,58.3 102.7,54.1 102.7,49.2 99.7,46.2 99.5,46.2 99.5,51.6 93.7,57.4 93.4,57.4
  region net 6V: 113.5,44.27 113.5,44.1 111,41.6 97.4,41.6 97.4,45.6 97.7,45.9 97.6,46 93.2,46 90.1,49.1 87.3,46.3 86.8,46.3 86.8,40.3 86.6,40.1 122.5,40.1 122.5,44.6 115.6,44.6
  region net GND: 84,42 77.5,42 77.5,46 64.5,46 64.5,63 67.5,63 67.5,65.96 67.46,66 67.46,69.66 57.54,69.66 56.7,70.5 56.7,83.2 58,84.5 58,120.5 68.062,120.5 68.5,120.938 68.5,127 54.5,127 54.5,121.5 49,121.5 49,46.5 54.5,46.5 54.5,40 85.5,40 85.5,42 84.5,43
  text "03/09/15" at 130.5,122 h1 r180
  text "Feed Timer Rev 1" at 130.5,120 h1 r180

## Silkscreen, mask and mechanical layers (free items; w line width, h text height)
Top Overlay:
  text "JOAO D. A. OLIVEIRA" at 51.6,45.4 h2 r90
  text "FEED TIMER DP7SEG" at 54.9,45.4 h2 r90
  text "03/09/15 Rev 1" at 58.2,45.4 h2 r90
Mechanical 1:
  circle w0.254: c141,124 r1.4
  circle w0.254: c52,43 r1.649
  circle w0.254: c141,43 r1.7
  circle w0.254: c52,124 r1.526
  lines w0.254: 41.492,41.524 42,40 ; 41.492,125.476 42,127 ; 41.746,40 42.254,40 ; 41.746,127 42.254,127 ; 42,78.396 42,40 ; 42,88.604 42,127 ; 42.508,41.524 42,40 ; 42.508,125.476 42,127 ; 49,130.746 49,131.254 ; 50.524,130.492 49,131 ; 50.524,131.508 49,131 ; 91.396,131 49,131 ; 101.604,131 144,131 ; 142.476,130.492 144,131 ; 142.476,131.508 144,131 ; 144,130.746 144,131.254 ; 49,40 144,40 144,67 144,71 144,127 49,127 49,71 49,40 ; 49,40 49,40
  text "95 (mm)" at 91.65,130.086 h1.52
  text "87 (mm)" at 42.914,78.65 h1.52 r90

## Text inside footprints (layer, text, board x,y; h text height)
Q1: Top Overlay "2" at 70.5,70.225 h1.5 r180; Top Overlay "1" at 72.775,70.225 h1.5 r180; Top Overlay "3" at 67.875,70.225 h1.5 r180
T1: Top Overlay "e" at 105.005,110.959 h1; Top Overlay "b" at 103.63,109.634 h1; Top Overlay "c" at 105.005,108.609 h1
T2: Top Overlay "c" at 90.97,108.634 h1; Top Overlay "b" at 89.595,109.659 h1; Top Overlay "e" at 90.97,110.909 h1
T3: Top Overlay "c" at 78.778,108.634 h1; Top Overlay "b" at 77.403,109.659 h1; Top Overlay "e" at 78.778,110.909 h1
T4: Top Overlay "c" at 65.189,108.634 h1; Top Overlay "b" at 63.814,109.659 h1; Top Overlay "e" at 65.189,110.909 h1
T5: Top Overlay "c" at 101.5,65.5 h0.89 r180; Top Overlay "b" at 98.75,64 h0.89 r180; Top Overlay "e" at 101.5,62.25 h0.89 r180